# EAGLE board generic_midi_1 (EAGLE 6.4)
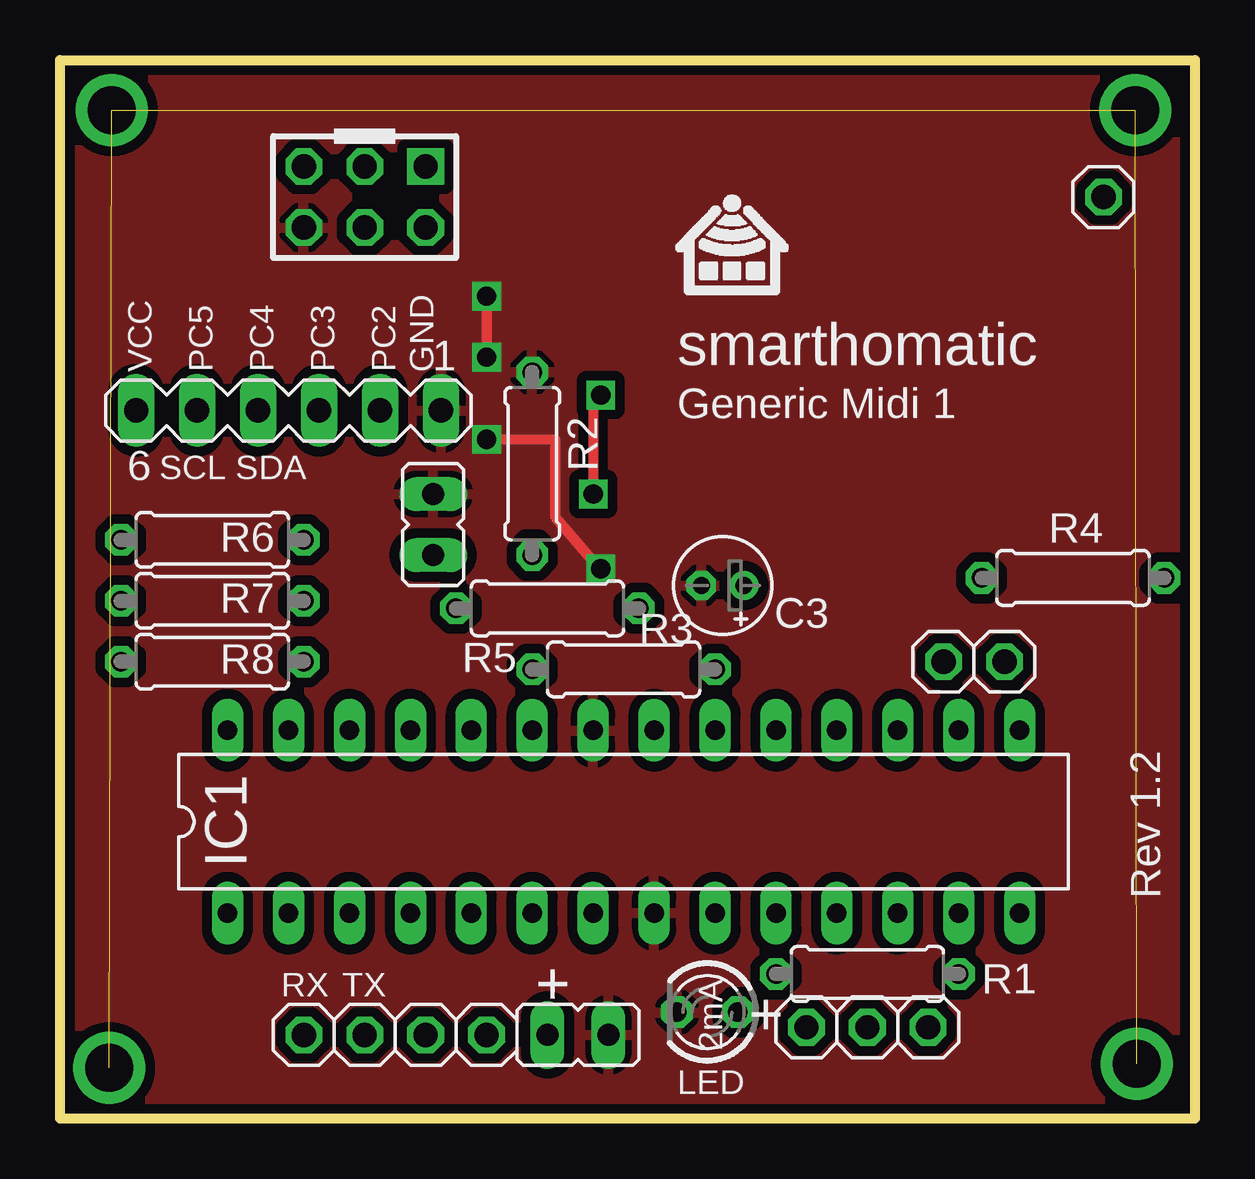
[diagram p0: board, top side]
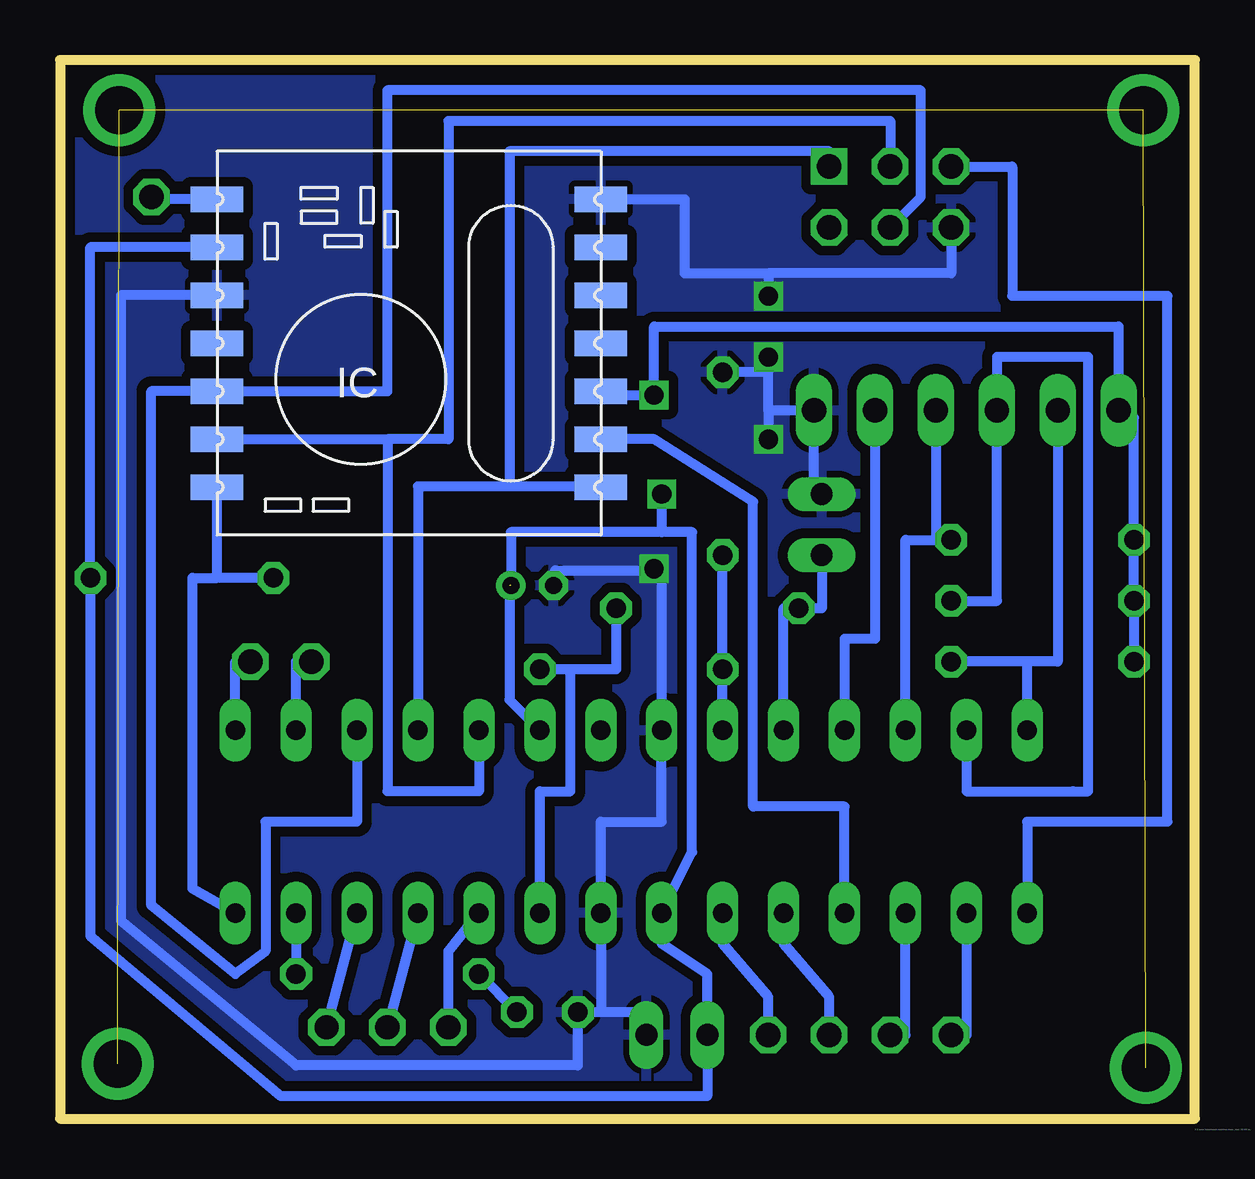
[diagram p1: board, bottom side, seen from below]

Size 47.31 x 44.13 mm. Coordinates in mm from the lower left corner, seen from the top.
Outline: 0,0 0,44.13 47.31,44.13 47.31,0 0,0
Copper layers (1*16): Top 0.035mm / dielectric 1.5mm / Bottom 0.035mm
Design rules "Fusion_eagle_rule_v1.1": minimum track width 6mil, minimum drill 12mil, track to track 6mil, track to pad 6mil, pad to pad 6mil, via to via 6mil, smd to smd 0mil, copper to edge 10mil, drill to drill 10mil, minimum pad ring 10mil, minimum via ring 6mil, stop-mask expansion 2mil, vias tented up to drill 100mil, thermal gap 10mil
Net classes: 0 default: clearance 0.305 mm

## Footprints (pad centres in the part's own frame; a part is rotated, then mirrored left to right if it is on the bottom)
E1,8-4 = drill 0.711 pad 1.168: + -0.889,0 | drill 0.711 pad 1.168 octagon: - 0.889,0
DIL28-3 = drill 0.813 long: 1 -16.51,-3.81; 2 -13.97,-3.81; 3 -11.43,-3.81; 4 -8.89,-3.81; 5 -6.35,-3.81; 6 -3.81,-3.81; 7 -1.27,-3.81; 8 1.27,-3.81; 9 3.81,-3.81; 10 6.35,-3.81; 11 8.89,-3.81; 12 11.43,-3.81; 13 13.97,-3.81; 14 16.51,-3.81; 15 16.51,3.81; 16 13.97,3.81; 17 11.43,3.81; 18 8.89,3.81; 19 6.35,3.81; 20 3.81,3.81; 21 1.27,3.81; 22 -1.27,3.81; 23 -3.81,3.81; 24 -6.35,3.81; 25 -8.89,3.81; 26 -11.43,3.81; 27 -13.97,3.81; 28 -16.51,3.81
RFM = smd 2.184 x 1.067: 1 0,14; 2 0,12; 3 0,10; 4 0,8; 5 0,6; 6 0,4; 7 0,2; 8 16,2; 9 16,4; 10 16,6; 11 16,8; 12 16,10; 13 16,12; 14 16,14
AVR-ISP-6 = drill 1.016 square: 1 -2.54,-1.27 | drill 1.016 octagon: 2 -2.54,1.27; 3 0,-1.27; 4 0,1.27; 5 2.54,-1.27; 6 2.54,1.27
MA06-1 = drill 1.016 long: 1 -6.35,0; 2 -3.81,0; 3 -1.27,0; 4 1.27,0; 5 3.81,0; 6 6.35,0
JP1 = drill 0.914 long: 1 0,-1.27; 2 0,1.27
1X01 = drill 1.016 octagon: 1 0,0
LED3MM = drill 0.813 octagon: A -1.27,0; K 1.27,0
0207/7 = drill 0.813 octagon: 1 -3.81,0; 2 3.81,0

## Placement (x,y rotation side)
C3  10µ  [E1,8-4]  27.62,22.23 180 top
IC1  MEGA168/328  [DIL28-3]  23.5,12.38 0 top
IC2  RFM12  [RFM]  24.77,40.32 180 bottom
JP1  AVR-ISP-6  [AVR-ISP-6]  12.7,38.42 180 top
JP2  I/O  [MA06-1]  9.53,29.53 180 top
JP3  PHOTO  [JP1]  15.56,24.77 180 top
JP4  PWR  [JP1]  21.59,3.49 90 top
JP5  ANT  [1X01]  43.5,38.42 0 top
JP6  PB1  [1X01]  39.37,19.05 0 top
JP7  PB2  [1X01]  36.83,19.05 0 top
JP8  PD1  [1X01]  12.7,3.49 0 top
JP9  PD5  [1X01]  33.66,3.81 0 top
JP10  PD6  [1X01]  36.2,3.81 0 top
JP11  PD4  [1X01]  17.78,3.49 0 top
JP12  PD3  [1X01]  15.24,3.49 0 top
JP13  PB7  [1X01]  31.11,3.81 0 top
JP14  PD0  [1X01]  10.16,3.49 0 top
LED  2mA  [LED3MM]  26.99,4.45 180 top
R1  560R  [0207/7]  33.66,6.03 180 top
R2  150k  [0207/7]  19.68,27.3 270 top
R3  330k  [0207/7]  23.5,18.73 0 top
R4  1M  [0207/7]  42.23,22.54 180 top
R5  100k  [0207/7]  20.32,21.27 0 top
R6  10k  [0207/7]  6.35,24.13 0 top
R7  10k  [0207/7]  6.35,21.59 180 top
R8  10k  [0207/7]  6.35,19.05 180 top

## Library data of the parts
C3 R1-R8 = rcl
IC1 JP1 = avr-5-4.16
IC2 = hopeRF
JP2 = con-lstb; OC_FARNELL: unknown; OC_NEWARK: unknown
JP3 JP4 = jumper
JP5-JP14 = pinhead
LED = led

## Nets
GND: C3.- IC1.8 IC1.22 IC2.7 IC2.10 JP1.6 JP2.1 JP3.1 JP4.1 LED.K R2.1
N$1: IC1.24 JP3.2 R5.1
N$3: IC1.17 IC2.12 JP1.4
N$4: IC1.18 IC2.1 JP1.1
N$5: IC1.19 IC2.13 JP1.3
N$6: IC1.13 R1.1
N$7: IC1.27 JP2.4 R7.1
N$8: IC1.1 JP1.5
N$9: IC1.28 JP2.5 R8.1
N$10: IC1.26 JP2.3 R6.2
N$11: IC2.8 JP5.1
N$12: LED.A R1.2
N$13: IC1.14 IC2.14 R4.2
N$14: IC1.11 JP9.1
N$15: IC1.4 IC2.2
N$16: IC1.12 JP10.1
N$17: IC1.15 JP6.1
N$18: IC1.23 R2.2 R3.1
N$19: IC1.16 JP7.1
N$20: IC1.3 JP8.1
N$21: IC1.25 JP2.2
N$22: IC1.6 JP11.1
N$23: IC1.5 JP12.1
N$24: IC1.9 R3.2 R5.2
N$25: IC1.10 JP13.1
N$26: IC1.2 JP14.1
VCC: C3.+ IC1.7 IC1.20 IC2.3 IC2.9 JP2.6 JP4.2 R4.1 R6.1 R7.2 R8.2

## Tracks (layer width: path | path; a pad name or v marks a point on that pad's centre or on a via)
GND  (via drill 0.8)
  Top 0.406: v17.78,28.32 20.64,28.32 20.64,25.08 22.54,22.86 v22.54,22.92 | v17.78,34.29 v17.78,31.75
  Bottom 0.406: IC2.10 44.77,34.32 44.77,8.25 37.47,2.22 25.72,2.22 LED.K 24.77,4.45 | 22.23,22.86 IC1.22 22.23,12.38 24.77,12.38 IC1.8 24.77,4.45 | JP1.6 10.16,35.24 17.78,35.24 | IC2.7 21.27,38.32 21.27,35.24 17.78,35.24 | 17.78,29.53 JP2.1 15.88,26.03 JP3.1 | C3.- 26.67,22.23 26.67,22.86 22.23,22.86 | 22.23,22.86 v22.54,22.92 | 17.78,31.12 R2.1 | 17.78,29.53 17.78,31.12 | 17.78,29.53 v17.78,28.32 | 17.78,35.24 v17.78,34.29 | v17.78,31.75 17.78,31.12 | JP4.1 22.86,4.45 24.77,4.45
  pour Bottom (isolate 0.406): -1.27,45.4 48.26,45.4 48.26,-0.32 -1.27,-0.32
  pour Top (isolate 0.406): -0.64,44.45 47.94,44.45 47.94,-0.95 -0.64,-0.95
N$1
  Bottom 0.406: JP3.2 15.56,21.27 R5.1 17.14,21.27 IC1.24
N$2  (via drill 2)  (3 unrouted)
  other vias: 2.16,42.04 44.83,42.04 44.89,2.29 2.05,2.12
N$3
  Bottom 0.406: IC1.17 34.92,12.38 38.73,12.38 38.73,6.99 40.01,6.03 43.5,8.89 43.5,30.32 IC2.12 33.66,30.32 33.66,42.86 11.43,42.86 11.43,38.42 JP1.4
N$4
  Bottom 0.406: JP1.1 15.24,40.32 28.57,40.32 28.57,26.35 | 28.57,26.35 32.38,26.35 IC1.18 | IC2.1 24.77,26.35 28.57,26.35
N$5
  Bottom 0.406: IC1.19 29.84,13.65 33.66,13.65 33.66,28.32 | JP1.3 12.7,41.59 31.11,41.59 31.11,28.32 33.66,28.32 | IC2.13 33.66,28.32
N$6
  Bottom 0.406: IC1.13 R1.1
N$7
  Bottom 0.406: R7.1 8.26,21.59 JP2.4 8.26,31.75 4.45,31.75 4.45,13.65 5.08,13.65 9.53,13.65 IC1.27
N$8
  Bottom 0.406: JP1.5 7.62,39.69 7.62,34.29 1.14,34.29 1.14,12.38 6.99,12.38 IC1.1
N$9
  Bottom 0.406: IC1.28 6.99,19.05 | 6.99,19.05 R8.1 | JP2.5 5.71,19.05 6.99,19.05
N$10
  Bottom 0.406: 10.79,24.13 R6.2 10.79,24.13 | JP2.3 10.79,24.13 | IC1.26 12.06,24.13 10.79,24.13
N$11
  Bottom 0.406: IC2.8 43.5,38.32 JP5.1
N$12
  Bottom 0.406: LED.A R1.2
N$13
  Bottom 0.406: IC1.14 41.78,9.59 41.78,18.73 41.78,22.54 40.77,22.54 | R4.2 40.77,22.54 | 40.77,22.54 IC2.14
N$14
  Bottom 0.406: IC1.11 JP9.1
N$15
  Bottom 0.406: IC1.4 14.61,13.02 18.41,13.02 18.41,25.72 22.54,28.32 IC2.2
N$16
  Bottom 0.406: JP10.1 IC1.12
N$17
  Bottom 0.406: IC1.15 40.01,19.05 JP6.1
N$18
  Bottom 0.406: IC1.23 R3.1 R2.2
N$19
  Bottom 0.406: IC1.16 37.47,19.05 JP7.1
N$20
  Bottom 0.406: JP8.1 12.06,3.49 IC1.3
N$21
  Bottom 0.406: IC1.25 14.61,20 13.34,20 JP2.2
N$22
  Bottom 0.406: JP11.1 17.78,5.08 19.68,7.3 IC1.6
N$23
  Bottom 0.406: JP12.1 15.24,5.08 17.14,7.3 IC1.5
N$24
  Bottom 0.406: IC1.9 27.3,13.65 26.04,13.65 26.04,18.73 | 26.04,18.73 R3.2 | R5.2 24.13,18.73 26.04,18.73
N$25
  Bottom 0.406: JP13.1 31.11,6.99 IC1.10
N$26
  Bottom 0.406: IC1.2 9.53,3.49 JP14.1
VCC  (via drill 0.8)  (1 unrouted)
  Top 0.406: v22.54,30.16 22.23,30.16 v22.23,26.03
  Bottom 0.406: IC2.3 24.77,30.16 v22.54,30.16 22.54,33.02 3.17,33.02 JP2.6 2.54,29.21 R6.1 R7.2 R8.2 | IC2.9 46.04,36.32 R4.1 46.04,7.62 38.1,0.95 20.32,0.95 JP4.2 20.32,6.03 22.23,7.3 IC1.7 20.95,11.11 20.95,24.45 22.23,24.45 | 22.23,24.45 28.51,24.45 C3.+ | IC1.20 28.57,17.46 28.57,22.23 | v22.23,26.03 22.23,24.45

## Text on the board
tNames: smarthomatic | VCC | PC5 | PC4 | PC3 | PC2 | GND | Generic Midi 1 | SCL | SDA | Rev 1.2 | RX | TX | + | + | 2mA
bNames: D:/Eigene Dateien/smarthomatic/logo/logo_black 150x133.bmp